# Altium PCB MCU64.PcbDoc
Units mm, origin at the board's own origin, x right, y up, seen from the top; angles counter-clockwise.
Board outline 29.4 x 45.5 mm, 2 copper layers (Top Layer, Bottom Layer); 29 components, 61 nets, 173 pads, 21 vias.
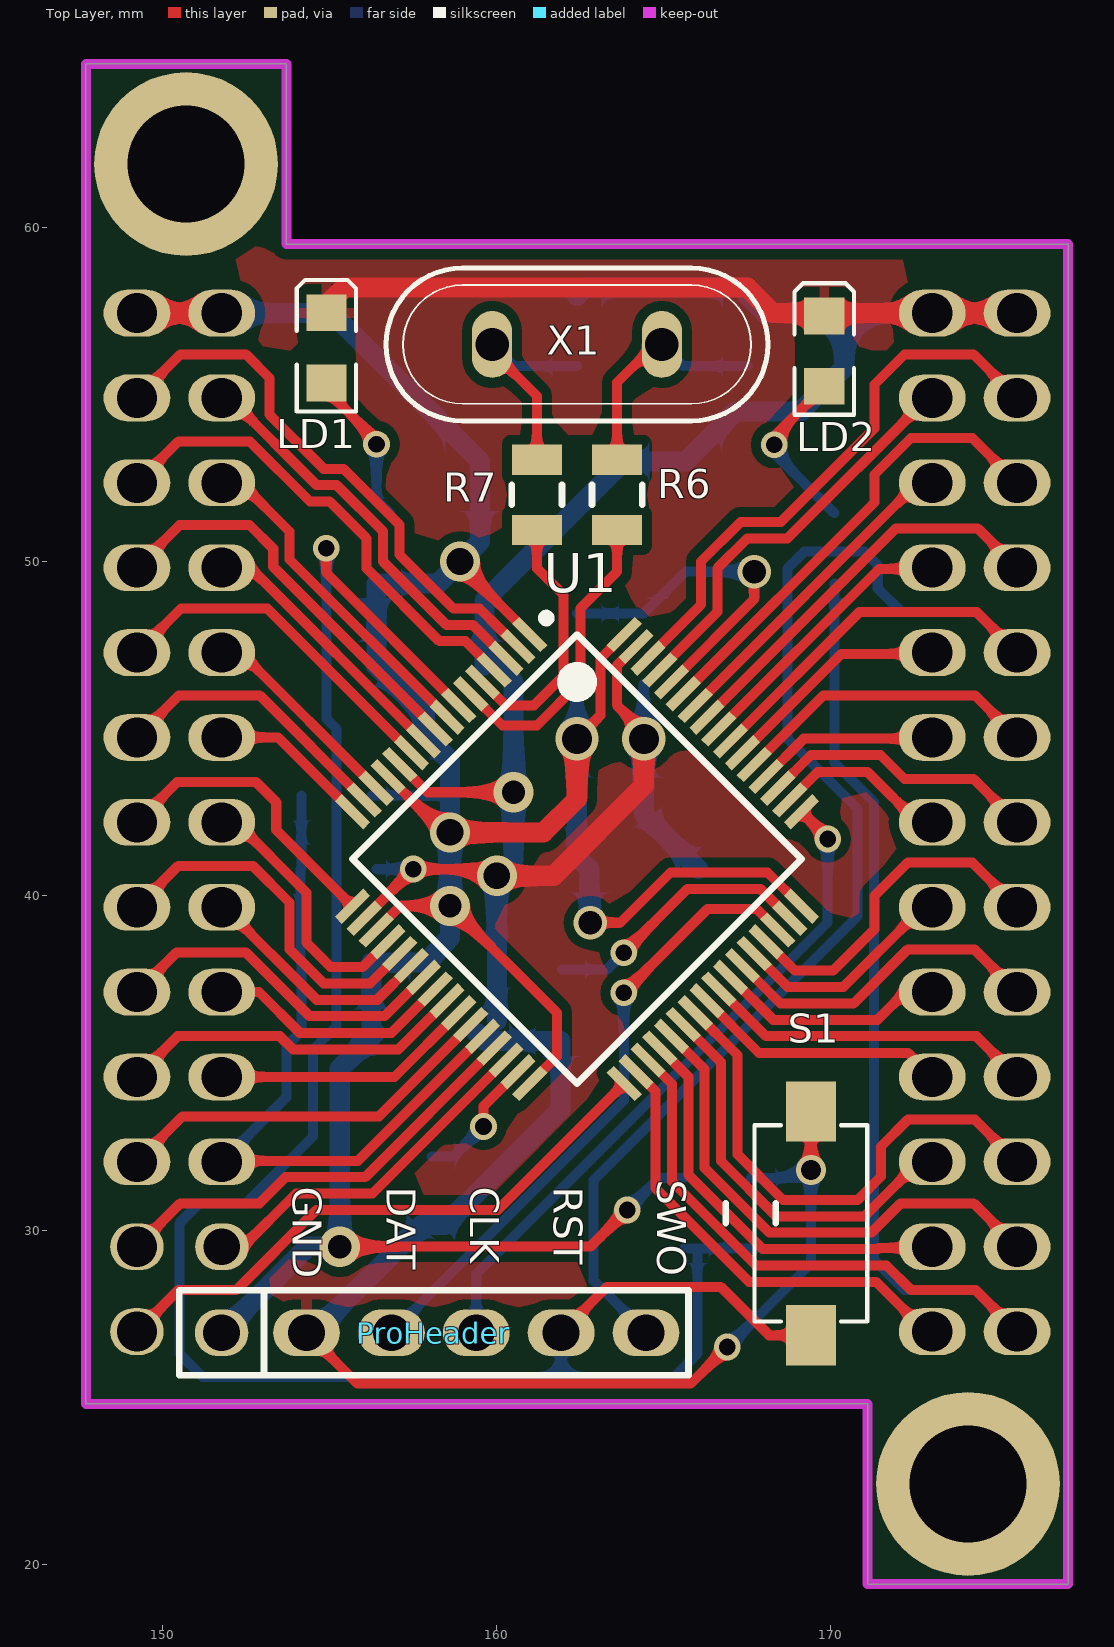
[diagram p0: Top Layer view]
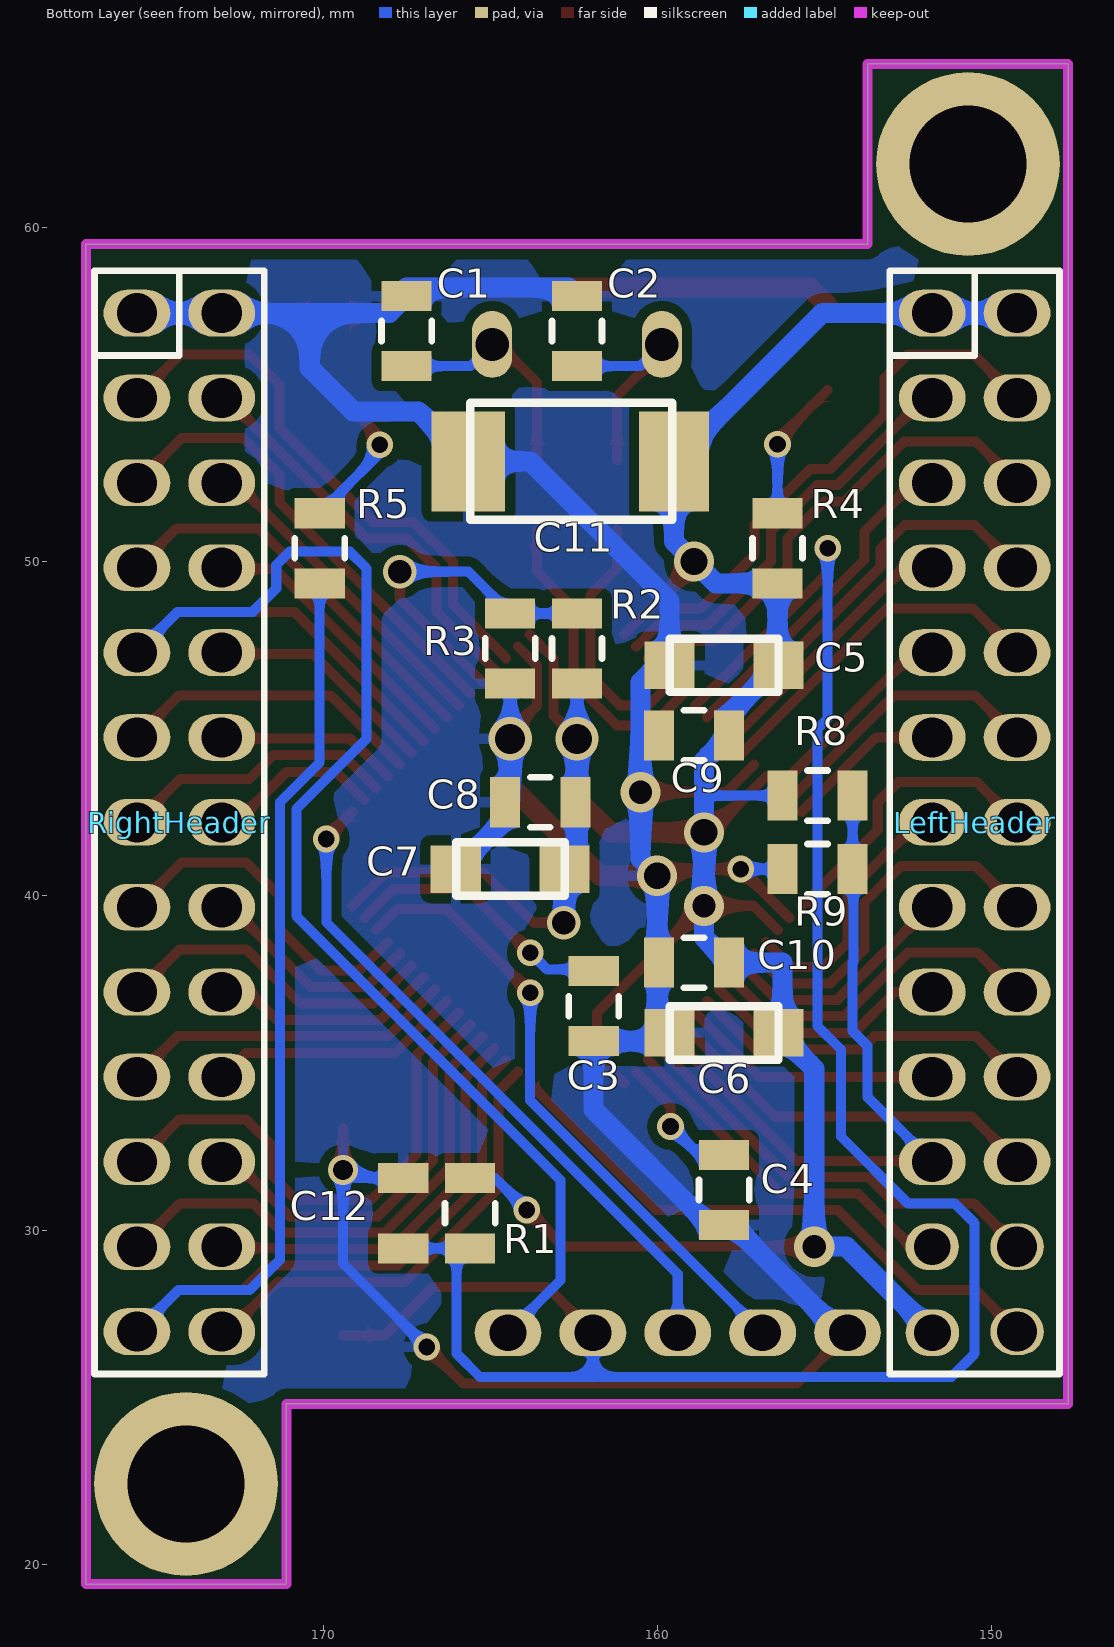
[diagram p1: Bottom Layer view, seen from below]
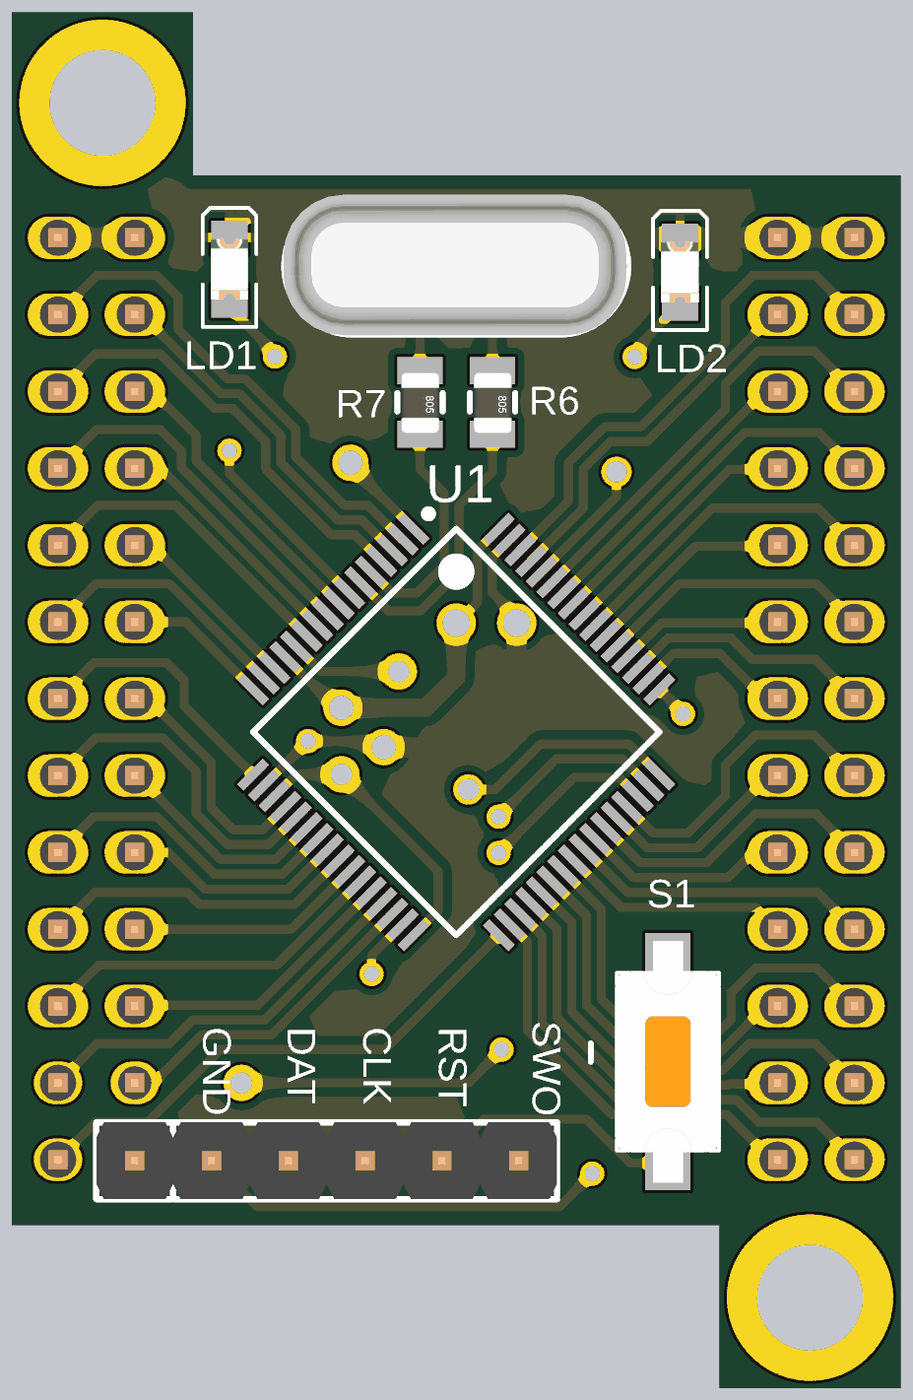
[diagram p2: 3D render of the assembled board from above, using the file's embedded part models]
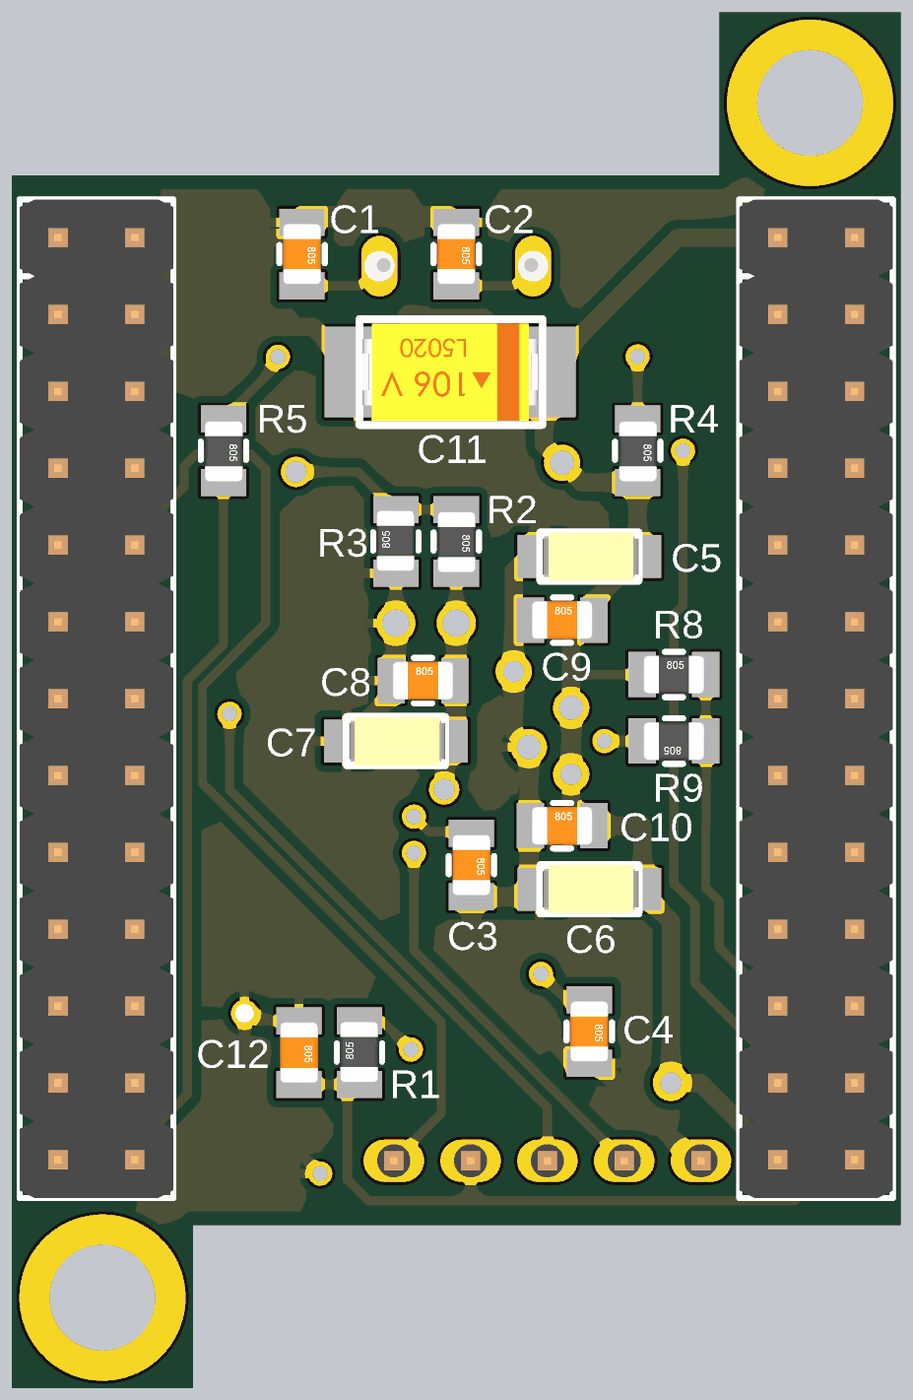
[diagram p3: 3D render of the assembled board from below, using the file's embedded part models]

## Layer stack, top to bottom
Top Solder: solder mask 0.0102, Solder Resist, Dk 3.5
Top Layer: signal copper 0.0356
Dielectric 1: dielectric 0.32, FR-4, Dk 4.8
Bottom Layer: signal copper 0.0356
Bottom Solder: solder mask 0.0102, Solder Resist, Dk 3.5

## Board outline
147.7,24.8 147.7,64.9 153.7,64.9 153.7,59.5 177.1,59.5 177.1,19.4 171.1,19.4 171.1,24.8

## Design rules (kind name [scope] priority, off if disabled: settings)
Clearance [All] p1: gap=0.19 ignorepadtopadclearanceinfootprint=FALSE except(0: Arc-Hole Track-Hole SMDPad-Hole THPad-Hole Via-Hole Fill-Hole Poly-Hole Region-Hole Text-Hole; 0.3: Arc-Poly Track-Poly SMDPad-Poly THPad-Poly Via-Poly Fill-Poly Poly-Poly Poly-Region Poly-Text)
PolygonConnect [All] p1: connectstyle=Relief reliefconductorwidth=0.3 reliefentries=4 polygonreliefangle="90 Angle" airgapwidth=0.3
RoutingVias [All] p1: holewidth=0.711 width=1.27 viastyle="Through Hole" minholewidth=0.711 minwidth=1.27 maxholewidth=0.711 maxwidth=1.27
SolderMaskExpansion [All] p1: expansion=0.102
Width [All] p1: maxlimit=0.7 minlimit=0.2 preferedwidth=0.3
30 further rules are at their usual default settings.

## Components (designator, comment, footprint, x,y, rotation, side; value= is the part's Value field where it differs from the comment)
C1 "20pF" "SMD 805 CAP"#1 167.5,56.9 r270 bottom
C2 "20pF" "SMD 805 CAP"#1 162.4,56.9 r270 bottom
C3 "2.2uF" "SMD 805 CAP"#1 161.9,36.7 r270 bottom
C4 "2.2uF" "SMD 805 CAP"#1 158,31.2 r270 bottom
C5 "1uF" MY_CAP_SMD-A 158,46.9 r0 bottom value=3300u
C6 "1uF" MY_CAP_SMD-A 158,35.9 r0 bottom value=3300u
C7 "1uF" MY_CAP_SMD-A 164.4,40.8 r0 bottom value=3300u
C8 "100nF" "SMD 805 CAP"#1 163.5,42.8 r180 bottom
C9 "100nF" "SMD 805 CAP"#1 158.9,44.8 r180 bottom
C10 "100nF" "SMD 805 CAP"#1 158.9,38 r180 bottom
C11 "Cap" MY_CAP_SMD-D 162.3,53.1 r0 bottom value=3300u
C12 "100nF" "SMD 805 CAP"#2 167.6,30.5 r270 bottom
LD1 "150080BS75000" LED_0805_Blue 154.9,56.4 r90 top
LD2 "150080BS75000" LED_0805_Blue 169.8,56.3 r90 top
LeftHeader "2*13" 61302621121#1 150.5,42.2 r270 bottom
ProHeader "WE-2.54 mm Pin Header & Jumper 61300611121" 61300611121 151.765,26.924 r0 top
R1 "10K" "SMD 805"#1 165.6,30.5 r90 bottom
R2 "10K" "SMD 805"#1 162.4,47.4 r270 bottom
R3 "510" "SMD 805"#1 164.4,47.4 r90 bottom
R4 "330" "SMD 805"#1 156.4,50.4 r270 bottom
R5 "470" "SMD 805"#1 170.1,50.4 r270 bottom
R6 "220" "SMD 805"#1 163.6,52 r270 top
R7 "0" "SMD 805"#1 161.2,52 r270 top
R8 "10K" "SMD 805"#2 155.2,43 r180 bottom
R9 "510" "SMD 805"#2 155.2,40.8 r0 bottom
RightHeader "2*13" 61302621121#2 174.3,42.2 r270 bottom
S1 "Tact Switch" 4341x10438x6 169.4,30.2 r90 top
U1 "STM32F405RGT6" TQFP64_V 162.4,41.1 r315 top locked
X1 "8MHz-10ppm" My_Crystal 162.4,56.5 r0 top

## Footprints (in the part's own frame and the unit in brackets; to place one, negate y for a bottom-side part, rotate by r counter-clockwise, add the part's x,y. Pads: shape width x height; smd on the part's side, far side on the other; paste and mask are expansions set on the pad)
4341x10438x6 [mm] "6.0*3.5mm vertical type, SMD, height 4.3mm, white actuator, 260gf, T&R"
  rect 1.8x1.5 smd: 1(-3.35,0) 2(3.35,0)
  silkscreen extent -2.94,-1.69 2.94,1.69, body extent -4,-1.75 4,1.75, height 4.31
61300611121 [mm] "6 pins, 1 row, straight, gold plating"
  oval 1.6x1.4 hole 1.1: 1(0,0)
  oval 2x1.4 hole 1.1: 2(2.54,0) 3(5.08,0) 4(7.62,0) 5(10.16,0) 6(12.7,0)
  silkscreen extent -1.27,-1.27 13.97,1.27, body extent -1.27,-1.27 13.97,1.27, height 8.54
61302621121#1 [mm] "26 pins, dual pin, straight, gold plating"
  oval 1.4x2 hole 1.2: 1(-15.24,-1.27) 2(-12.7,-1.27) 3(-10.16,-1.27) 4(-7.62,-1.27) 5(-5.08,-1.27) 6(-2.54,-1.27) 7(0,-1.27) 8(2.54,-1.27) 9(5.08,-1.27) 10(7.62,-1.27) 11(10.16,-1.27) 16(10.16,1.27) 17(7.62,1.27) 18(5.08,1.27) 19(2.54,1.27) 20(0,1.27) 21(-2.54,1.27) 22(-5.08,1.27) 23(-7.62,1.27) 24(-10.16,1.27) 25(-12.7,1.27) 26(-15.24,1.27)
  oval 1.4x1.6 hole 1.1: 12(12.7,-1.27)
  oval 1.4x1.6 hole 1.2: 14(15.24,1.27) 15(12.7,1.27)
  silkscreen extent -16.51,-2.54 16.51,2.54, body extent -16.51,-2.54 16.51,2.54, height 8.55
61302621121#2 [mm] "26 pins, dual pin, straight, gold plating"
  oval 1.4x2 hole 1.2: 1(-15.24,-1.27) 2(-12.7,-1.27) 3(-10.16,-1.27) 4(-7.62,-1.27) 5(-5.08,-1.27) 6(-2.54,-1.27) 7(0,-1.27) 8(2.54,-1.27) 9(5.08,-1.27) 10(7.62,-1.27) 11(10.16,-1.27) 12(12.7,-1.27) 13(15.24,-1.27) 14(15.24,1.27) 15(12.7,1.27) 16(10.16,1.27) 17(7.62,1.27) 18(5.08,1.27) 19(2.54,1.27) 20(0,1.27) 21(-2.54,1.27) 22(-5.08,1.27) 23(-7.62,1.27) 24(-10.16,1.27) 25(-12.7,1.27) 26(-15.24,1.27)
  silkscreen extent -16.51,-2.54 16.51,2.54, body extent -16.51,-2.54 16.51,2.54, height 8.55
LED_0805_Blue [mm] "Chip LED, 2-Leads, Body 2.0x1.3mm, IPC Medium Density"
  rect 1.1x1.2 smd: 1(-1.05,0) 2(1.05,0)
  silkscreen extent -1.91,-0.89 2.03,0.89, body extent -1,-0.63 1,0.62, height 0.68
MY_CAP_SMD-A [mm] "1.6X3.25"
  rect 1.5x1.42 smd: +(-1.63,0) -(1.63,0)
  silkscreen extent -1.63,-0.8 1.62,0.8, body extent -1.64,-0.8 1.54,0.8, height 1.77
MY_CAP_SMD-D [mm] "3.5X6"
  rect 2.1x3 smd: +(-2.8,0.1)
  rect 2.2x3 smd: -(3.35,0.1)
  silkscreen extent -2.75,-1.65 3.3,1.85, body extent -2.6,-1.5 3.2,1.7, height 2.6
My_Crystal [mm]
  oval 1.2x2 hole 1: 1(-2.54,0) 2(2.54,0)
  silkscreen extent -5.71,-2.29 5.71,2.29, body extent -5.71,-2.29 5.64,2.36, height 3.8
"SMD 805"#1 [mm]
  rect 0.9x1.5 smd: 1(-1.05,0) 2(1.05,0)
  silkscreen extent -0.3,-0.75 0.3,0.75, body extent -0.98,-0.61 1.02,0.64, height 0.78
"SMD 805"#2 [mm]
  rect 0.9x1.5 smd: 1(1.05,0) 2(-1.05,0)
  silkscreen extent -0.3,-0.75 0.3,0.75, body extent -1,-0.62 1,0.63, height 0.78
"SMD 805 CAP"#1 [mm]
  rect 0.9x1.5 smd: 1(-1.05,0) 2(1.05,0)
  silkscreen extent -0.3,-0.75 0.3,0.75, body extent -1,-0.62 1,0.63, height 0.78
"SMD 805 CAP"#2 [mm]
  rect 0.9x1.5 smd: 1(1.05,0) 2(-1.05,0)
  body extent -1,-0.62 1,0.63, height 0.78
TQFP64_V [mm] "Thin QFP, 64-Leads, Body 10x10mm, Pitch 0.5mm, ST Recommended"
  rect 1.2x0.3 smd: 1(-5.75,3.75) 2(-5.75,3.25) 3(-5.75,2.75) 4(-5.75,2.25) 5(-5.75,1.75) 6(-5.75,1.25) 7(-5.75,0.75) 8(-5.75,0.25) 9(-5.75,-0.25) 10(-5.75,-0.75) 11(-5.75,-1.25) 12(-5.75,-1.75) 13(-5.75,-2.25) 14(-5.75,-2.75) 15(-5.75,-3.25) 16(-5.75,-3.75) 33(5.75,-3.75) 34(5.75,-3.25) 35(5.75,-2.75) 36(5.75,-2.25) 37(5.75,-1.75) 38(5.75,-1.25) 39(5.75,-0.75) 40(5.75,-0.25) 41(5.75,0.25) 42(5.75,0.75) 43(5.75,1.25) 44(5.75,1.75) 45(5.75,2.25) 46(5.75,2.75) 47(5.75,3.25) 48(5.75,3.75)
  rect 0.3x1.2 smd: 17(-3.75,-5.75) 18(-3.25,-5.75) 19(-2.75,-5.75) 20(-2.25,-5.75) 21(-1.75,-5.75) 22(-1.25,-5.75) 23(-0.75,-5.75) 24(-0.25,-5.75) 25(0.25,-5.75) 26(0.75,-5.75) 27(1.25,-5.75) 28(1.75,-5.75) 29(2.25,-5.75) 30(2.75,-5.75) 31(3.25,-5.75) 32(3.75,-5.75) 49(3.75,5.75) 50(3.25,5.75) 51(2.75,5.75) 52(2.25,5.75) 53(1.75,5.75) 54(1.25,5.75) 55(0.75,5.75) 56(0.25,5.75) 57(-0.25,5.75) 58(-0.75,5.75) 59(-1.25,5.75) 60(-1.75,5.75) 61(-2.25,5.75) 62(-2.75,5.75) 63(-3.25,5.75) 64(-3.75,5.75)
  silkscreen extent -5.87,-4.75 4.75,4.75, body extent -5,-5 5,5, height 1.6

## Part data
C1 C2 C3 C4 C8 C9 C10 C12: library part "CAP without Pole"
C5 C6 C7: library part CAP_TANTAL_A, "3.2X1.6MM"
C11: library part CAP_TANTAL_D, "7.3X4.3MM"
LD1 LD2: library part "WL-SMCW 0805  150080BS75000", "SMD mono-color Chip LED, WL-SMCW, Blue", Color=Blue, Manufacturer="W?th Elektronik eiSos GmbH", ComponentLink1Description=Manufacturer, ComponentLink1URL=http://www.we-online.de, ComponentLink2Description=Datasheet, ComponentLink2URL=http://katalog.we-online.com/led/datasheet/150080BS75000.pdf, Created by="Christin Otto", Created Date="June 2013", partNo=150080BS75000
LeftHeader RightHeader: library part "WE-2.54 mm Pin Header & Jumper 61302621121", "WR-PHD 2.54 mm Dual Pin Header", Manufacturer="Würth Elektronik eiSos GmbH", partNo=61302621121, ComponentLink1 Description=Manufacturer, ComponentLink1URL=http://www.we-online.com, ComponentLink2 Description=Datasheet, ComponentLink2URL=http://katalog.we-online.de/em/datasheet/6130xx21121.pdf, Created by="Karrer Zheng", Created Date="25 March 2013", NoPins=26
ProHeader: "WR-PHD 2.54mm Pin Header", Manufacturer="Würth Elektronik eiSos GmbH", partNo=61300611121, ComponentLink1 Description=Manufacturer, ComponentLink1URL=http://www.we-online.com, ComponentLink2 Description=Datasheet, ComponentLink2URL=http://katalog.we-online.de/em/datasheet/6130xx11121.pdf, Created by="Karrer Zheng", Created Date="22 March 2013", NoPins=06
R1 R2 R3 R4 R5 R6 R7 R8 R9: library part Resistor
S1: library part "WS-TASV, 434111043826", "WS-TASV 6.0x3.5 mm SMD", Manufacturer="Wurth Elektronik", partNo=434111043826, ComponentLink1Description=Manufacturer, ComponentLink1URL=http://www.we-online.de, ComponentLink2Description=Datasheet, ComponentLink2URL=http://katalog.we-online.de/em/datasheet/4341x1xxx8x6.pdf, Created by="Baojun Chen", Created Date=Dec.2015
U1: "ARM Cortex-M4 32b MCU+FPU, 210DMIP, 1024 kB Flash, 192+4 kB RAM, 51 I/Os, 64-pin LQFP, -40 to +85癈, Tray", Operating Frequency (Processor Speed)=168MHz, 16-bit Timers (IC/OC/PWM)=12x16-bit(24/24/30), 32-bit Timer (IC/OC/PWM)="2x32-bit (8/8/8)", A/D Converter=16x12-bit, ComponentLink1Description="Manufacturer URL", ComponentLink1URL=http://www.st.com/, ComponentLink2Description="STM32F405/7 Datasheet", ComponentLink2URL=http://www.st.com/internet/com/TECHNICAL_RESOURCES/TECHNICAL_LITERATURE/DATASHEET/DM00037051.pdf, ComponentLink3Description="STM32F4 Web Page", ComponentLink3URL=http://www.st.com/internet/mcu/subclass/1521.jsp, D/A Converter=2x12-bit, DatasheetVersion="rev2, Jan-2012", Internal RAM=192kB, Other Timer Functions="2xWDG, RTC, 24-bit down counter", PackageDescription="64-Pin Low Profile Quad Flat Package, 10x10 mm Body, 0.5 mm Pitch", PackageReference=TQFP64, PackageVersion=2012, Serial Interface="3xSPI/2xI2S/2xI2C/3xUSART(IrDa, ISO7816)/3xUART/1xUSB OTG FS/HS, 2xCAN/ SDIO"
X1: library part CRYSTAL, "Crystal"

## Free pads (board coordinates)
  round 5.5 hole 3.5: 2(150.7,61.9) 2(174.1,22.4)

## Via types
v1: diameter 0.8, hole 0.5, Top Layer to Bottom Layer, 10 vias
v2: diameter 1.2, hole 0.7, Top Layer to Bottom Layer, 3 vias
v3: diameter 1.2, hole 0.8, Top Layer to Bottom Layer, 3 vias
v4: diameter 1.3, hole 0.9, Top Layer to Bottom Layer, 2 vias
v5: diameter 1, hole 0.7, Top Layer to Bottom Layer, 2 vias
v6: diameter 0.9, hole 0.6, Top Layer to Bottom Layer, 1 vias

## Nets (pads, with @x,y where several pads share a name; then routed paths per layer and width w, separated by ;. In a path a pad name is that pad's centre, name@x,y a point inside that pad or via, vN(x,y) a via of type N, cw(c..) or ccw(c..) an arc to the next point about the centre after c; other vN are vias at no path point)
3.3V: C5.+ C6.+ C7.+ C8.2 C9.2 C10.2 C11.+ LeftHeader.1 LeftHeader.26 ProHeader.1 R1.2 R2.2 R4.2 R8.2 U1.1 U1.13 U1.19 U1.32 U1.48 U1.64 | length 101.6
  Top Layer w0.3: v2(155.3,29.5) 162.8,29.5 v1(163.9,30.6) ; U1.19 157.111,39.7 v2(158.6,39.7) 161.8,36.5 161.8,35.197 U1.32 ; U1.13 158.418,41.9 v3(158.6,41.9) ; v3(158.9,50.003) 158.9,49.903 U1.1 ; v4(162.4,44.7) 163.1,45.4 163.1,47.103 U1.64 ; v5(162.8,39.2) 163.7,39.2 165.2,40.7 168.103,40.7 U1.48
  Top Layer w0.6: LeftHeader.26 LeftHeader.1 ; v3(158.6,41.9) 161.4,41.9 162.4,42.9 v4(162.4,44.7)
  Bottom Layer w0.3: C6.+@156.25,36.02 C6.+ ; R8.2 158.6,43 ; v4(162.4,44.7) R2.2 ; v1(163.9,30.6) 164.85,31.55 R1.2
  Bottom Layer w0.6: LeftHeader.26 LeftHeader.1 155.06,57.44 C11.+ 159.5,50.602 v3(158.9,50.003) 158.247,49.35 R4.2 C5.+@156.4,46.93 ; ProHeader.1 154.341,29.5 v2(155.3,29.5) 155.3,34.83 C6.+ ; C6.+@156.25,36.02 156.25,38 C10.2 158.6,38.75 v2(158.6,39.7) v3(158.6,41.9) 158.6,43 158.6,44.05 C9.2 157.85,45.42 C5.+ ; v4(162.4,44.7) 162.4,41.17 C7.+ v5@162.77,39.03
GND: C1.1 C2.1 C3.2 C4.2 C5.- C6.- C7.- C8.1 C9.1 C10.1 C11.- C12.2 LD1.2 LD2.2 ProHeader.2 R3.1 R9.1 RightHeader.1 RightHeader.26 S1.2 U1.12 U1.18 U1.63 | length 127.7
  Top Layer w0.3: ProHeader.2 155.829,25.4 165.8,25.4 v1(166.9,26.5) ; U1.18 157.504,40.8 159.8,40.8 v3(160,40.6) ; U1.12 157.925,43.1 v2(160.5,43.1) ; U1.63 163.59,46.886 163.59,45.71 164.4,44.9 v4(164.4,44.7) ; v6@169.4,31.5 v6(169.4,31.8) S1.2@169.4,33.05
  Top Layer w0.6: LD1.2@154.9,57.67 155.43,58.2 167.5,58.2 168.26,57.44 RightHeader.26 RightHeader.1 ; v3(160,40.6) 161.7,40.6 164.4,43.3 v4(164.4,44.7)
  Bottom Layer w0.3: R9.1@156.4,40.8 v1(157.5,40.8) ; v4(164.4,44.7) R3.1 ; v1(166.9,26.5) 169.4,29 v6(169.4,31.8) 169.15,31.55 C12.2
  Bottom Layer w0.6: ProHeader.2 154.524,26.924 157.75,30.15 C4.2 158.45,30.15 161.9,33.6 C3.2 159.65,35.65 C6.-@159.4,35.9 ; C5.- 159.63,48.83 163.8,53 C11.- 167.15,54.5 169.1,54.5 170.4,55.8 170.4,57.44 ; C6.-@160,36.27 v3(160,40.6) 160.5,41.1 v2(160.5,43.1) 160.5,46.4 C5.-@160,46.9 ; C2.1 162.65,58.2 167.5,58.2 C1.1 168.01,57.44 170.4,57.44 ; v4(164.4,44.7) 164.4,42.43 C7.- ; RightHeader.1 RightHeader.26 170.4,57.44
LEDCONTROL1: R5.2 RightHeader.13 U1.35 | length 42.4
  Top Layer w0.3: U1.35 165.24,34.371 165.24,31.453 167.753,28.94 171.66,28.94 172.4,28.2 174.33,28.2 RightHeader.13 ; RightHeader.13@175.876,26.924 RightHeader.13@176.276,26.924
  Bottom Layer w0.3: R5.2@170.1,49.35 170.1,43.993 171.29,42.803 171.29,29.11 172.2,28.2 174.33,28.2 RightHeader.13
NetC1_2: C1.2 R6.1 X1.2 | length 6.8
  Top Layer w0.3: R6.1 163.6,55.36 X1.2@164.74,56.5
  Bottom Layer w0.3: X1.2 165.59,55.85 C1.2
NetC2_2: C2.2 R7.1 X1.1 | length 6.9
  Top Layer w0.3: X1.1@159.66,56.5 161.2,54.96 R7.1
  Bottom Layer w0.3: X1.1 160.51,55.85 C2.2
NetC3_1: C3.1 U1.47 | length 8.2
  Top Layer w0.3: v1(163.8,38.3) 165.71,40.21 167.886,40.21 U1.47
  Bottom Layer w0.3: C3.1@161.95,37.8 163.3,37.8 v1(163.8,38.3)
NetC4_1: C4.1 U1.31 | length 4
  Top Layer w0.3: v1(159.6,33.1) 159.6,33.704 U1.31
  Bottom Layer w0.3: C4.1@158.05,32.2 158.7,32.2 v1(159.6,33.1)
NetLD1_1: LD1.1 R4.1 | length 4.4
  Top Layer w0.3: LD1.1@154.9,55.13 v1@156.4,53.63
  Bottom Layer w0.3: v1(156.4,53.515) 156.4,51.85 R4.1@156.8,51.45
NetLD2_1: LD2.1 R5.1 | length 5.2
  Top Layer w0.3: v1(168.3,53.5) 168.3,53.75 LD2.1
  Bottom Layer w0.3: v1(168.3,53.5) 168.3,53.25 R5.1
NetR2_1: R2.1 R3.2 U1.60 | length 10.1
  Top Layer w0.3: U1.60 167.7,48.875 v5(167.7,49.7)
  Bottom Layer w0.3: R2.1 R3.2 165.65,49.7 v5(167.7,49.7)
NetR6_2: R6.2 U1.6 | length 9.2
  Top Layer w0.3: U1.6 160.168,45.1 161.2,45.1 162.5,46.4 162.5,48.6 163.6,49.7 R6.2
NetR7_2: R7.2 U1.5 | length 7.8
  Top Layer w0.3: U1.5 160.275,45.7 161.107,45.7 162,46.593 162,49 161.2,49.8 R7.2
NRST: C12.1 ProHeader.5 R1.1 S1.1 U1.7 | length 64.8
  Top Layer w0.3: v1(154.9,50.4) 154.9,49.661 U1.7 ; ProHeader.5 163.301,28.3 166.7,28.3 168.15,26.85 S1.1
  Bottom Layer w0.3: v1(154.9,50.4) 154.9,45.3 155.2,45 155.2,36.1 154.5,35.4 154.5,32.8 152.5,30.8 151.1,30.8 150.5,30.2 150.5,26.3 151.2,25.6 161.925,25.6 ; ProHeader.5 161.925,25.6 ; R1.1 R1.1@166,29.45 ; C12.1@167.8,29.5 167.75,29.45 C12.1 R1.1@166,29.45 ; 161.925,25.6 165.3,25.6 166,26.3 R1.1@166,29.45
PA0: LeftHeader.5 U1.14 | length 6.3
  Top Layer w0.3: LeftHeader.5 152.331,47.28 U1.14
PA1: LeftHeader.21 U1.15 | length 8.6
  Top Layer w0.3: LeftHeader.21 150.49,46 152.904,46 U1.15
PA2: LeftHeader.6 U1.16 | length 4.8
  Top Layer w0.3: LeftHeader.6 153.457,44.74 U1.16
PA3: LeftHeader.20 U1.17 | length 9
  Top Layer w0.3: LeftHeader.20 150.43,43.4 152.8,43.4 153.4,42.8 153.4,41.968 U1.17
PA4: LeftHeader.7 U1.20 | length 8
  Top Layer w0.3: LeftHeader.7 152.2,42.2 154.3,40.1 154.3,38.6 155.03,37.87 155.988,37.87 U1.20
PA5: LeftHeader.19 U1.21 | length 11
  Top Layer w0.3: LeftHeader.19 150.47,40.9 152.7,40.9 153.8,39.8 153.8,38.4 154.82,37.38 156.205,37.38 U1.21
PA6: LeftHeader.8 U1.22 | length 7.6
  Top Layer w0.3: LeftHeader.8@151.77,39.33 LeftHeader.8 151.84,39.66 154.61,36.89 156.422,36.89 U1.22
PA7: LeftHeader.18 U1.23 | length 10.3
  Top Layer w0.3: LeftHeader.18 150.41,38.3 152.5,38.3 154.4,36.4 156.639,36.4 U1.23
PA8: RightHeader.10 U1.41 | length 10
  Top Layer w0.3: U1.41 168.054,35.8 174.35,35.8 RightHeader.10
PA9: RightHeader.18 U1.42 | length 6.9
  Top Layer w0.3: U1.42 168.271,36.29 171.39,36.29 172.184,37.084 RightHeader.18@173.03,37.084
PA10: RightHeader.9 U1.43 | length 10.6
  Top Layer w0.3: U1.43 168.488,36.78 170.68,36.78 172.3,38.4 174.29,38.4 RightHeader.9 ; RightHeader.9@175.616,37.084 RightHeader.9@176.276,37.084
PA11: RightHeader.19 U1.44 | length 6.7
  Top Layer w0.3: U1.44 168.705,37.27 170.37,37.27 172.724,39.624 RightHeader.19@173.03,39.624
PA12: RightHeader.8 U1.45 | length 10.4
  Top Layer w0.3: U1.45 168.922,37.76 170.06,37.76 171.3,39 171.3,40 172.3,41 174.23,41 RightHeader.8
PA13: ProHeader.3 U1.46 | length 19
  Top Layer w0.3: v1(163.8,37.1) 166.3,39.6 167.789,39.6 U1.46
  Bottom Layer w0.3: ProHeader.3 163.8,33.879 v1(163.8,37.1)
PA14: ProHeader.4 U1.49 | length 20.3
  Top Layer w0.3: U1.49 169.932,41.7 v1(169.9,41.7)
  Bottom Layer w0.3: ProHeader.4 159.385,28.685 169.9,39.2 v1(169.9,41.7)
PA15: RightHeader.20 U1.50 | length 5.2
  Top Layer w0.3: U1.50 169.596,43.7 171.1,43.7 172.636,42.164 RightHeader.20@173.03,42.164
PB0: LeftHeader.10 U1.26 | length 7.9
  Top Layer w0.3: LeftHeader.10 156.941,34.58 U1.26
PB1: LeftHeader.16 U1.27 | length 11.7
  Top Layer w0.3: LeftHeader.16 150.59,33.4 156.468,33.4 U1.27
PB2: LeftHeader.11 R8.1 R9.2 U1.28 | length 21.3
  Top Layer w0.3: LeftHeader.11 151.8,32.07 155.845,32.07 U1.28
  Bottom Layer w0.3: LeftHeader.11 153.7,33.97 153.7,35.5 154.15,35.95 154.15,38 154.13,38.02 154.13,40.8 154.15,40.82 R8.1
PB3: ProHeader.6 RightHeader.5 U1.55 | length 47.1
  Top Layer w0.3: U1.55 170.861,48.5 174.35,48.5 RightHeader.5
  Bottom Layer w0.3: ProHeader.6 162.9,28.489 162.9,31.5 170.8,39.4 170.8,42.6 168.7,44.7 168.7,49.8 169.2,50.3 171,50.3 171.4,49.9 171.4,49.2 172.1,48.5 174.35,48.5 RightHeader.5
PB4: RightHeader.23 U1.56 | length 8.4
  Top Layer w0.3: U1.56 171.438,49.784 RightHeader.23@173.03,49.784
PB5: RightHeader.4 U1.57 | length 12.1
  Top Layer w0.3: U1.57 171.946,51 174.39,51 RightHeader.4
PB6: RightHeader.24 U1.58 | length 10.5
  Top Layer w0.3: U1.58 172.563,52.324 RightHeader.24@173.736,52.324
PB7: RightHeader.3 U1.59 | length 14.2
  Top Layer w0.3: U1.59 171.3,51.768 171.3,52.607 172.393,53.7 174.23,53.7 RightHeader.3
PB8: RightHeader.25 U1.61 | length 13
  Top Layer w0.3: U1.61 164.875,46.771 166.6,48.496 166.6,49.8 167.5,50.7 168.7,50.7 172.864,54.864 RightHeader.25@173.736,54.864
PB9: RightHeader.2 U1.62 | length 16.9
  Top Layer w0.3: U1.62 164.521,47.125 166.11,48.713 166.11,50.003 167.297,51.19 168.497,51.19 171.3,53.993 171.3,55.3 172.2,56.2 174.27,56.2 RightHeader.2
PB10: LeftHeader.15 U1.29 | length 13.2
  Top Layer w0.3: LeftHeader.15 150.53,30.8 152.9,30.8 153.68,31.58 156.062,31.58 U1.29
PB11: LeftHeader.12 U1.30 | length 10.8
  Top Layer w0.3: LeftHeader.12 152.4,29.5 153.99,31.09 156.279,31.09 U1.30
PB12: LeftHeader.14 U1.33 | length 17.7
  Top Layer w0.3: LeftHeader.14 150.47,28.2 152.2,28.2 154.6,30.6 160.032,30.6 U1.33
PB13: RightHeader.14 U1.34 | length 13.8
  Top Layer w0.3: U1.34 164.75,34.154 164.75,31.25 167.55,28.45 171.35,28.45 172.876,26.924 RightHeader.14@173.03,26.924
PB15: RightHeader.15 U1.36 | length 13.1
  Top Layer w0.3: U1.36 165.73,34.588 165.73,31.656 167.956,29.43 171.409,29.43 171.443,29.464 RightHeader.15@173.736,29.464
PC0: LeftHeader.3 U1.8 | length 10.1
  Top Layer w0.3: LeftHeader.3 152.34,52.36 153.8,50.9 153.8,50.068 158.511,45.357 U1.8
PC1: LeftHeader.23 U1.9 | length 12.3
  Top Layer w0.3: LeftHeader.23 150.51,51.1 152.6,51.1 153.31,50.39 153.31,49.851 158.157,45.003 U1.9
PC2: LeftHeader.4 U1.10 | length 8.2
  Top Layer w0.3: LeftHeader.4 152.619,49.82 U1.10
PC3: LeftHeader.22 U1.11 | length 10.6
  Top Layer w0.3: LeftHeader.22 150.55,48.6 153.132,48.6 U1.11
PC4: LeftHeader.9 U1.24 | length 7.4
  Top Layer w0.3: LeftHeader.9 152.88,37.12 154.1,35.9 156.846,35.9 U1.24
PC5: LeftHeader.17 U1.25 | length 10.6
  Top Layer w0.3: LeftHeader.17 150.45,35.8 153.507,35.8 153.907,35.4 157.054,35.4 U1.25
PC6: RightHeader.12 U1.37 | length 15.4
  Top Layer w0.3: U1.37 166.22,34.805 166.22,31.859 168.159,29.92 171.206,29.92 172.086,30.8 174.27,30.8 RightHeader.12
PC7: RightHeader.16 U1.38 | length 12.9
  Top Layer w0.3: U1.38 166.71,35.022 166.71,32.062 168.362,30.41 171.003,30.41 172.597,32.004 RightHeader.16@173.736,32.004
PC8: RightHeader.11 U1.39 | length 15.7
  Top Layer w0.3: U1.39 167.2,35.239 167.2,32.265 168.565,30.9 170.8,30.9 171.5,31.6 171.5,32.5 172.3,33.3 174.31,33.3 RightHeader.11
PC9: RightHeader.17 U1.40 | length 8.6
  Top Layer w0.3: U1.40 167.846,35.3 172.31,35.3 RightHeader.17 RightHeader.17@172.58,34.58 ; RightHeader.17@173.244,34.544 RightHeader.17@173.736,34.544
PC10: RightHeader.7 U1.51 | length 8.4
  Top Layer w0.3: U1.51 169.403,44.214 171.486,44.214 172.2,43.5 174.27,43.5 RightHeader.7
PC11: RightHeader.21 U1.52 | length 5.4
  Top Layer w0.3: U1.52 169.186,44.704 RightHeader.21@173.03,44.704
PC12: RightHeader.6 U1.53 | length 9.2
  Top Layer w0.3: U1.53 169.775,46 174.31,46 RightHeader.6
PC13: LeftHeader.25 U1.2 | length 16.7
  Top Layer w0.3: LeftHeader.25 150.53,56.2 152.5,56.2 153.2,55.5 153.2,54.4 154.82,52.78 155.413,52.78 157.09,51.103 157.09,50.21 158.7,48.6 159.482,48.6 160.101,47.981 160.618,47.464 U1.2
PC14: LeftHeader.2 U1.3 | length 12.5
  Top Layer w0.3: LeftHeader.2 152,54.9 154.61,52.29 155.21,52.29 156.6,50.9 156.6,50 158.49,48.11 159.279,48.11 U1.3 ; LeftHeader.2@152.295,54.705 LeftHeader.2@152.489,54.9
PC15: LeftHeader.24 U1.4 | length 14.6
  Top Layer w0.3: LeftHeader.24 150.47,53.6 152.607,53.6 154.407,51.8 155,51.8 156.1,50.7 156.1,49.8 158.28,47.62 159.062,47.62 U1.4 U1.4@159.911,46.757
PD2: RightHeader.22 U1.54 | length 6.9
  Top Layer w0.3: U1.54 170.312,47.244 RightHeader.22@173.03,47.244

## Polygon pours and split planes (outlines as drawn)
GND on Top Layer "Top" (solid, remove dead copper, pour order 8): 147.7,64.9 153.7,64.9 153.7,59.5 177.1,59.5 177.1,19.4 171.1,19.4 171.1,24.8 147.7,24.8
GND on Bottom Layer "Bottom" (solid, remove dead copper, pour order 10): 147.7,64.9 153.7,64.9 153.7,59.5 177.1,59.5 177.1,19.4 171.1,19.4 171.1,24.8 147.7,24.8

## Keep-outs
Keep-Out Layer:
  the board outline again, w0.3

## Silkscreen, mask and mechanical layers (free items; w line width, h text height)
Top Overlay:
  text "SWO" at 164.5,31.5 h1.5 r270
  text "GND" at 153.6,31.3 h1.5 r270
  text "DAT" at 156.4,31.3 h1.5 r270
  text "CLK" at 158.9,31.3 h1.5 r270
  text "RST" at 161.4,31.3 h1.5 r270